# EAGLE board dsub-25 junction board (EAGLE 5.11)
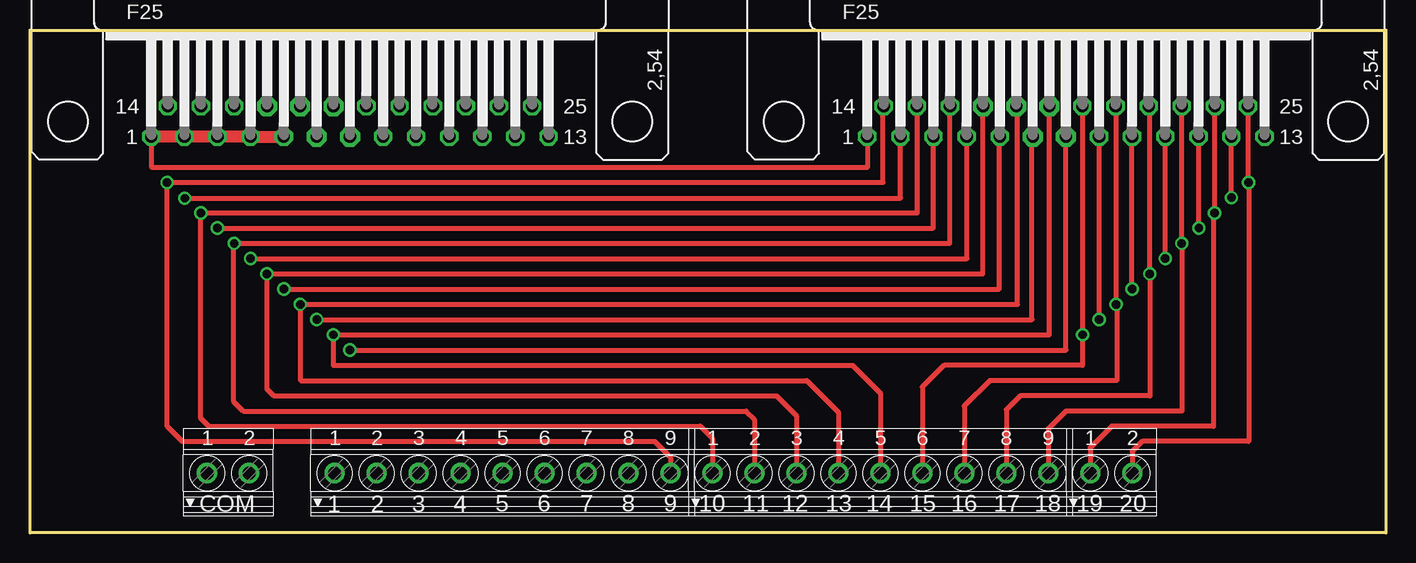
[diagram p0: board, top side]
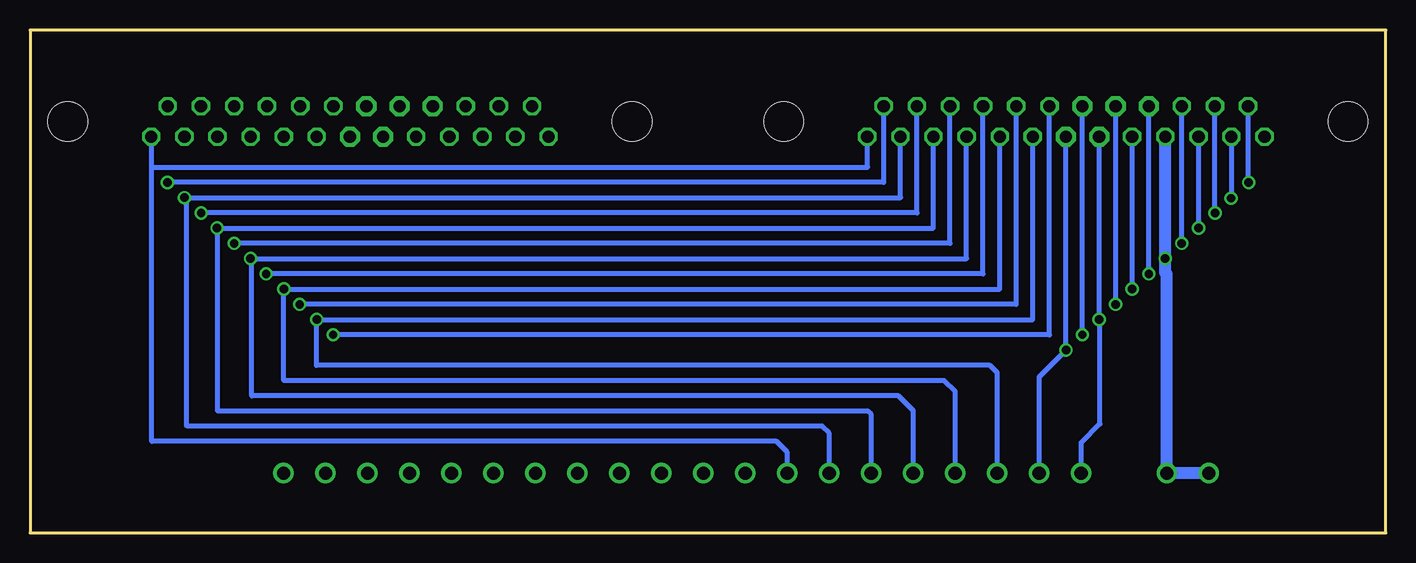
[diagram p1: board, bottom side, seen from below]

Size 113.03 x 41.91 mm. Coordinates in mm from the lower left corner, seen from the top.
Outline: 0,0 0,41.91 113.03,41.91 113.03,0 0,0
Copper layers (1*16): Top 0.035mm / dielectric 1.5mm / Bottom 0.035mm
Design rules "default": minimum track width 10mil, minimum drill 24mil, track to track 8mil, track to pad 8mil, pad to pad 8mil, via to via 8mil, smd to smd 8mil, copper to edge 40mil, drill to drill 8mil, minimum pad ring 10mil, minimum via ring 8mil, stop-mask expansion 4mil, vias tented up to drill 0mil, thermal gap 10mil

## Footprints (pad centres in the part's own frame; a part is rotated, then mirrored left to right if it is on the bottom)
F25H = drill 1.016 octagon: 1 -16.561,-1.27; 2 -13.792,-1.27; 3 -11.049,-1.27; 4 -8.28,-1.27; 5 -5.512,-1.27; 8 2.769,-1.27; 9 5.512,-1.27; 10 8.28,-1.27; 11 11.049,-1.27; 12 13.792,-1.27; 13 16.561,-1.27; 14 -15.189,1.27; 15 -12.421,1.27; 16 -9.652,1.27; 20 1.372,1.27; 21 4.14,1.27; 22 6.909,1.27; 23 9.652,1.27; 24 12.421,1.27; 25 15.189,1.27 | drill 1.016 pad 1.67 octagon: 6 -2.769,-1.27; 7 0,-1.27; 17 -6.909,1.27; 18 -4.14,1.27; 19 -1.372,1.27 | hole 3.302: -23.52,0; 23.52,0
1751316 = drill 1.1 pad 1.7 round: 1 -13.973,-0.1; 2 -10.473,-0.1; 3 -6.973,-0.1; 4 -3.473,-0.1; 5 0.028,-0.1; 6 3.527,-0.1; 7 7.027,-0.1; 8 10.527,-0.1; 9 14.027,-0.1
1751248 = drill 1.1 pad 1.7 round: 1 -1.75,-0.1; 2 1.75,-0.1

## Placement (x,y rotation side)
E$1  [F25H]  26.67,34.29 0 top
E$2  [F25H]  86.36,34.29 0 top
E$3  [1751316]  70.87,5.08 0 top
E$4  [1751248]  16.51,5.08 0 top
E$5  [1751316]  39.37,5.08 0 top
E$6  [1751248]  90.14,5.08 0 top

## Library data of the parts
E$1 E$2 = con-subd
E$3-E$6 = con-phoenix-350

## Nets
S$1: E$1.1 E$1.2 E$1.3 E$1.4 E$1.5 E$2.1 E$2.2 E$2.3 E$2.4 E$2.5 E$4.1 E$4.2
S$6: E$1.6 E$2.6 E$5.1
S$7: E$1.7 E$2.7 E$5.2
S$8: E$1.8 E$2.8 E$5.3
S$9: E$1.9 E$2.9 E$5.4
S$10: E$1.10 E$2.10 E$5.5
S$11: E$1.11 E$2.11 E$5.6
S$12: E$1.12 E$2.12 E$5.7
S$13: E$1.13 E$2.13 E$5.8
S$14: E$1.14 E$2.14 E$5.9
S$15: E$1.15 E$2.15 E$3.1
S$16: E$1.16 E$2.16 E$3.2
S$17: E$1.17 E$2.17 E$3.3
S$18: E$1.18 E$2.18 E$3.4
S$19: E$1.19 E$2.19 E$3.5
S$20: E$1.20 E$2.20 E$3.6
S$21: E$1.21 E$2.21 E$3.7
S$22: E$1.22 E$2.22 E$3.8
S$23: E$1.23 E$2.23 E$3.9
S$24: E$1.24 E$2.24 E$6.1
S$25: E$1.25 E$2.25 E$6.2

## Tracks (layer width: path | path; a pad name or v marks a point on that pad's centre or on a via)
S$1  (via drill 0.7)
  Top 0.406: E$2.1 69.85,32.97 69.85,30.48 10.16,30.48 10.11,30.53 E$1.1 | E$2.3 75.31,25.4 v15.62,25.4 | E$2.2 72.57,27.89 v12.9,27.89 | E$2.4 78.11,32.99 78.11,22.86 v18.39,22.86 | E$2.5 80.8,32.97 80.8,20.32 v21.16,20.32
  Top 1.016: E$1.1 E$1.2 E$1.3 E$1.4 E$1.5
  Bottom 0.406: E$1.3 v15.62,25.4 | E$1.2 12.88,27.91 v12.9,27.89 | E$1.5 v21.16,20.32 | 18.26,21.59 18.39,21.72
  Bottom 1.016: E$1.4 v18.39,22.86 18.39,21.72 | E$4.1 E$4.2 18.26,21.59
S$6  (via drill 0.7)
  Top 0.406: v23.9,17.78 83.52,17.78 83.54,17.8 83.54,32.97 E$2.6
  Bottom 0.406: E$1.6 v23.9,17.78 23.82,17.7 23.82,9.09 25.4,7.52 E$5.1
S$7  (via drill 0.7)
  Top 0.406: v26.67,15.24 86.36,15.24 E$2.7
  Bottom 0.406: E$1.7 v26.67,15.24 28.9,13.01 E$5.2
S$8  (via drill 0.7)
  Top 0.406: v89.13,17.78 E$2.8
  Bottom 0.406: E$1.8 29.44,17.78 v89.13,17.78 89.15,17.75 89.15,13.97 33.02,13.97 32.4,13.35 E$5.3
S$9  (via drill 0.7)
  Top 0.406: v91.87,20.32 E$2.9
  Bottom 0.406: E$1.9 32.18,20.32 v91.87,20.32 91.9,20.3 91.9,12.78 91.82,12.7 36.83,12.7 35.9,11.77 E$5.4
S$10  (via drill 0.7)
  Top 0.406: v94.64,22.86 E$2.10
  Bottom 0.406: E$1.10 34.95,22.86 v94.64,22.86 94.54,22.76 94.54,11.43 40.64,11.43 39.4,10.19 E$5.5
S$11  (via drill 0.7)
  Top 0.406: v97.43,25.4 97.43,32.99 E$2.11
  Bottom 0.406: E$1.11 37.72,25.4 v97.43,25.4 97.38,25.35 97.38,10.16 43.18,10.16 42.9,9.88 E$5.6
S$12  (via drill 0.7)
  Top 0.406: v100.15,27.94 E$2.12
  Bottom 0.406: E$1.12 40.46,27.94 v100.15,27.94 99.97,27.76 99.97,8.94 99.92,8.89 46.99,8.89 46.4,8.3 E$5.7
S$13
  Bottom 0.406: E$1.13 43.23,30.53 43.18,30.48 102.87,30.48 | 102.87,30.48 102.87,32.97 E$2.13 | 102.87,30.48 102.87,7.62 50.8,7.62 49.9,6.72 E$5.8
S$14  (via drill 0.7)
  Top 0.406: E$2.14 71.12,35.51 71.12,29.21 v11.43,29.21 11.43,8.89 12.7,7.62 52.07,7.62 53.4,6.29 E$5.9
  Bottom 0.406: E$1.14 11.48,29.26 v11.43,29.21
S$15  (via drill 0.7)
  Top 0.406: v14.25,26.67 73.97,26.67 73.97,35.53 E$2.15 | E$3.1 56.89,7.88 55.88,8.89 14.91,8.89 14.25,9.55 v14.25,26.67 | v14.25,26.67 14.3,26.62
  Bottom 0.406: v14.25,26.67 E$1.15
S$16  (via drill 0.7)
  Top 0.406: E$2.16 76.68,35.53 76.68,24.13 v17.02,24.13 16.99,24.11 16.99,10.95 17.78,10.16 59.69,10.16 60.39,9.46 E$3.2
  Bottom 0.406: v17.02,24.13 E$1.16
S$17  (via drill 0.7)
  Top 0.406: E$2.17 79.43,35.53 79.43,21.59 v19.76,21.59 19.76,11.99 20.32,11.43 62.23,11.43 63.89,9.77 E$3.3
  Bottom 0.406: v19.76,21.59 E$1.17
S$18  (via drill 0.7)
  Top 0.406: v22.53,19.05 82.32,19.05 82.32,35.46 E$2.18 | E$3.4 67.39,10.08 64.77,12.7 22.58,12.7 22.58,19 v22.53,19.05 | v22.53,19.05 22.48,19
  Bottom 0.406: v22.53,19.05 E$1.18
S$19  (via drill 0.7)
  Top 0.406: v25.3,16.51 84.96,16.51 84.96,35.53 E$2.19 | v25.3,16.51 25.27,16.48 | E$3.5 70.89,11.66 68.58,13.97 25.3,13.97 v25.3,16.51
  Bottom 0.406: v25.3,16.51 E$1.19
S$20  (via drill 0.7)
  Top 0.406: E$2.20 87.76,35.53 v87.76,16.51 87.73,16.48 87.73,13.97 76.2,13.97 74.39,12.16 E$3.6
  Bottom 0.406: E$1.20 28.04,16.51 v87.76,16.51
S$21  (via drill 0.7)
  Top 0.406: E$2.21 90.55,35.51 v90.55,19.05 90.6,19 90.6,12.7 80.01,12.7 77.89,10.58 E$3.7
  Bottom 0.406: E$1.21 30.81,19.05 v90.55,19.05
S$22  (via drill 0.7)
  Top 0.406: E$2.22 93.34,35.48 v93.34,21.59 93.37,21.57 93.37,11.4 93.34,11.43 82.55,11.43 81.39,10.27 E$3.8
  Bottom 0.406: E$1.22 33.58,21.59 v93.34,21.59
S$23  (via drill 0.7)
  Top 0.406: E$2.23 v96.01,24.13 96.04,24.11 96.04,10.16 86.36,10.16 84.89,8.69 E$3.9
  Bottom 0.406: E$1.23 36.32,24.13 v96.01,24.13
S$24  (via drill 0.7)
  Top 0.406: E$2.24 98.75,35.53 v98.75,26.67 98.65,26.57 98.65,8.87 98.63,8.89 90.17,8.89 88.39,7.12 E$6.1
  Bottom 0.406: E$1.24 39.09,26.67 v98.75,26.67
S$25  (via drill 0.7)
  Top 0.254: v101.58,29.21 101.6,29.21
  Top 0.406: E$2.25 101.58,35.53 v101.58,29.21 101.6,29.18 101.6,7.62 92.71,7.62 91.89,6.8 E$6.2
  Bottom 0.406: E$1.25 41.86,29.21 v101.58,29.21

## Text on the board
tNames: COM | 1 | 2 | 3 | 4 | 5 | 6 | 7 | 8 | 9 | 10 | 11 | 12 | 13 | 14 | 15 | 16 | 17 | 18 | 19 | 20